# Altium PCB ESP8266_Amp_SMD.PcbDoc
Units mm, origin at the board's own origin, x right, y up, seen from the top; angles counter-clockwise.
Board outline 35.05 x 30.35 mm, 2 copper layers (Top Layer, Bottom Layer); 28 components, 26 nets, 93 pads, 23 vias.
Unrouted connection lines stored in the file: 1.
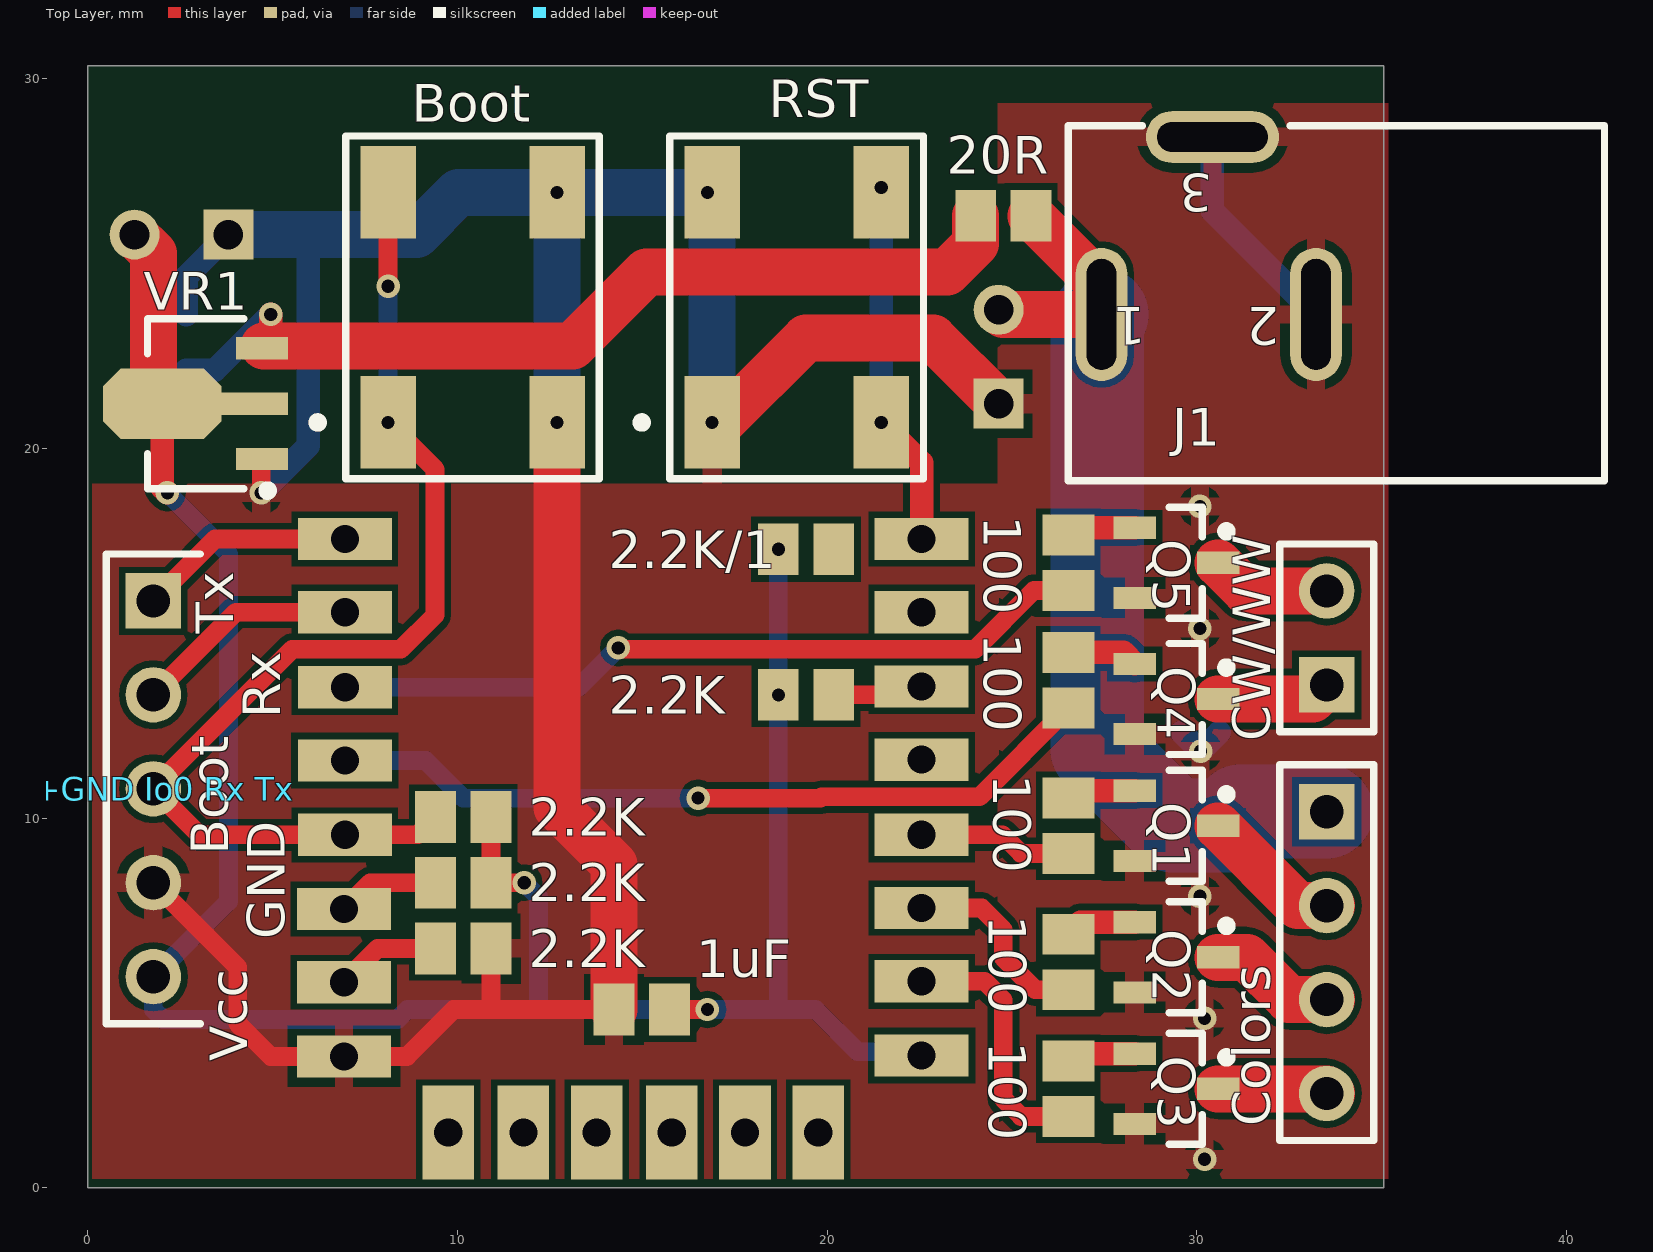
[diagram p0: Top Layer view]
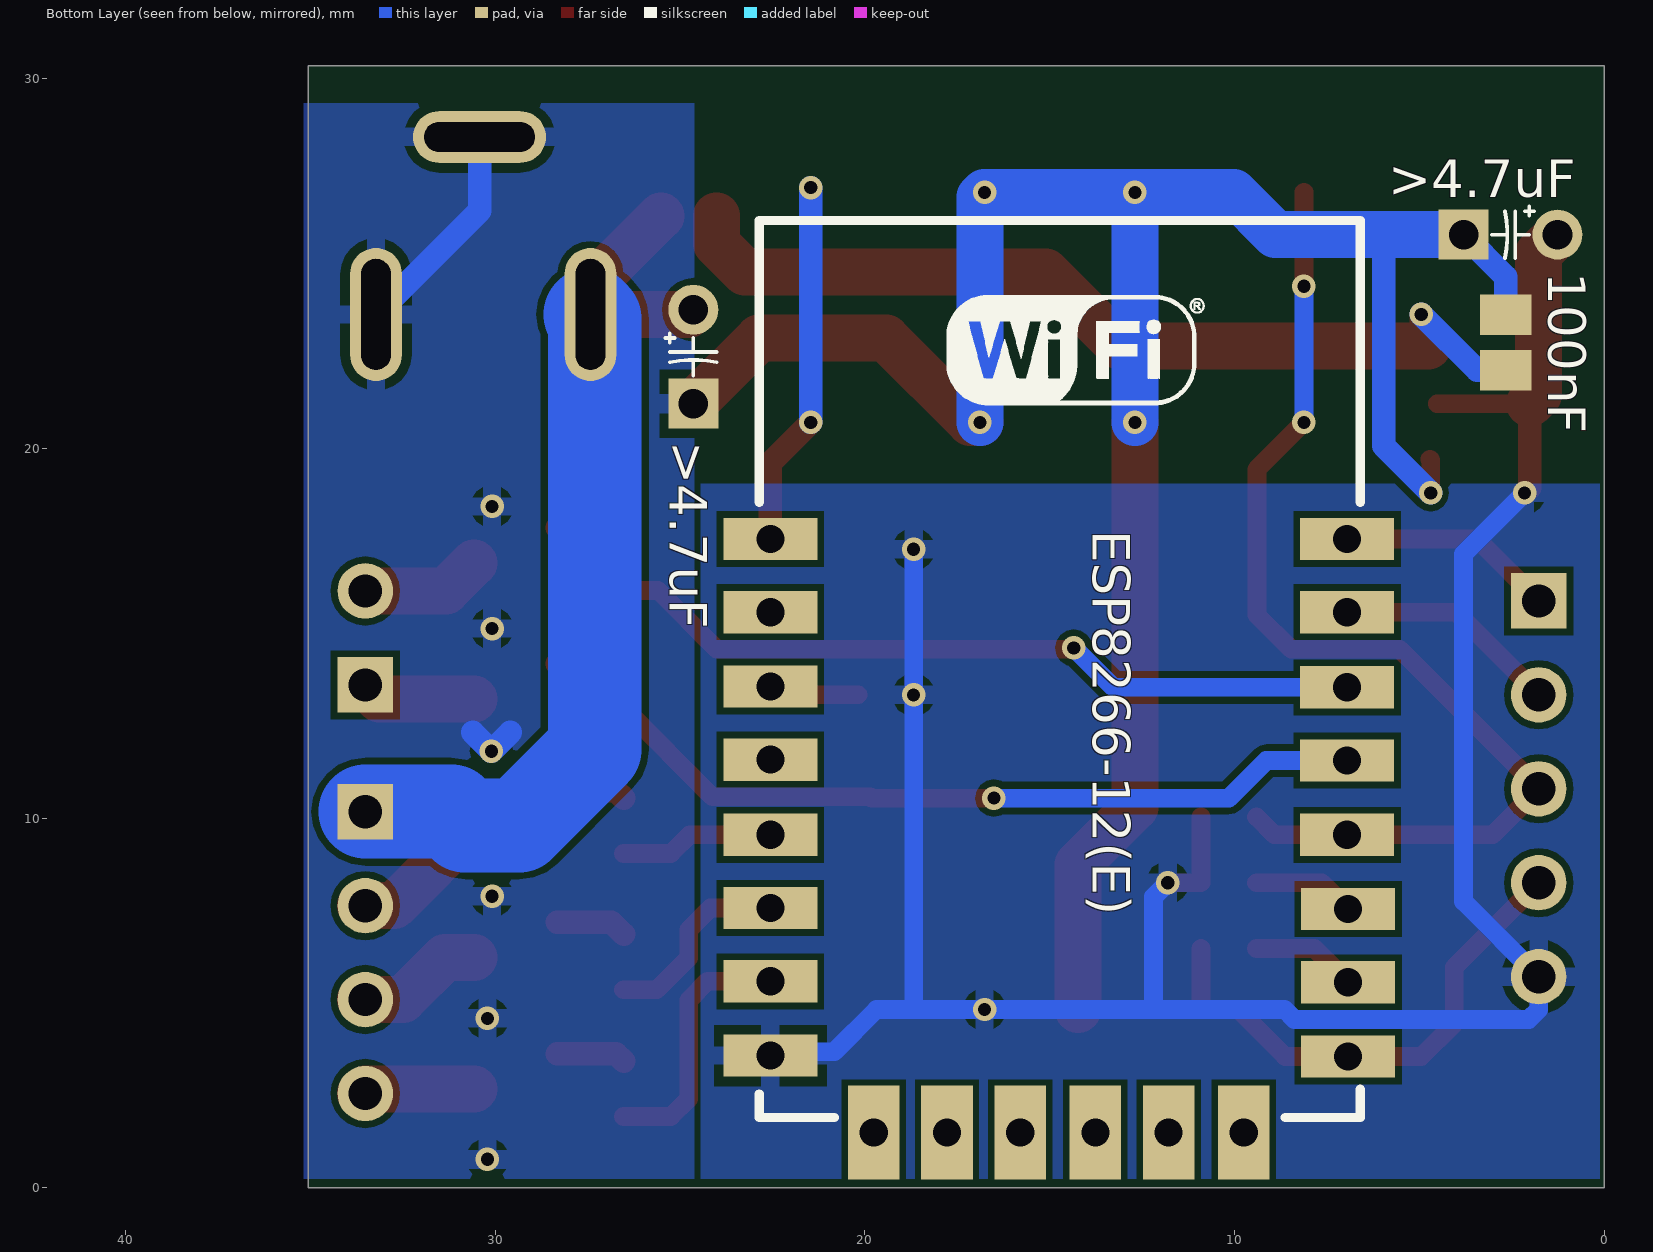
[diagram p1: Bottom Layer view, seen from below]

## Layer stack, top to bottom
Top Solder: solder mask 0.0102, Solder Resist, Dk 3.5
Top Layer: signal copper 0.0356
Dielectric 1: dielectric 0.32, FR-4, Dk 4.8
Bottom Layer: signal copper 0.0356
Bottom Solder: solder mask 0.0102, Solder Resist, Dk 3.5

## Board outline
0,0 0,30.353 35.052,30.353 35.052,0

## Design rules (kind name [scope] priority, off if disabled: settings)
Clearance [All] p1: gap=0.178
PolygonConnect [All] p1: connectstyle=Relief reliefconductorwidth=0.508 reliefentries=4 polygonreliefangle="90 Angle" airgapwidth=0.254
RoutingVias [All] p1: holewidth=0.356 width=0.635 viastyle="Through Hole" minholewidth=0.356 minwidth=0.635 maxholewidth=0.356 maxwidth=0.635
SolderMaskExpansion [All] p1: expansion=0.102
Width [All] p1: maxlimit=10 minlimit=0.254 preferedwidth=0.254 minimp=50.000000 maximp=50.000000 favimp=50.000000
29 further rules are at their usual default settings.

## Components (designator, comment, footprint, x,y, rotation, side; value= is the part's Value field where it differs from the comment)
1uF "Cap" 0805 14.986,4.826 r0 top (schematic designator C1)
2.2K "Res" 0805 19.431,13.335 r180 top
2.2K "Res" 0805 10.16,8.255 r180 top (schematic designator 2.2K/4)
2.2K "Res" 0805 10.16,10.033 r180 top (schematic designator 2.2K/3)
2.2K "Res" 0805 10.16,6.477 r180 top (schematic designator 2.2K/2)
2.2K/1 "Res" 0805 19.431,17.272 r180 top
20R "Res" 0805 24.765,26.289 r180 top (schematic designator R1)
100 "Res" 0805 26.525,2.682 r270 top (schematic designator 100R/5)
100 "Res" 0805 26.525,6.111 r270 top (schematic designator 100R/4)
100 "Res" 0805 26.525,9.794 r270 top (schematic designator 100R/3)
100 "Res" 0805 26.525,16.906 r270 top (schematic designator 100R/2)
100 "Res" 0805 26.525,13.731 r270 top (schematic designator 100R/1)
100nF "Cap" 0805 2.667,22.86 r270 bottom (schematic designator C2)
>4.7uF "Cap Pol" CAPR-2.54mm 2.54,25.781 r180 bottom (schematic designator C20)
>4.7uF "Cap Pol" CAPR-2.54mm 24.638,22.479 r90 bottom (schematic designator C19)
Boot "Tactile Switch" "Tactile-SW SMT" 8.128,20.828 r90 top
Colors "Header 4" HDR1X4 33.51,10.175 r270 top
CW/WW "Header 2" HDR1X2 33.51,13.604 r90 top
ESP8266-12(E) "ESP8266 ESP-12-E" "ESP8266 ESP-12-E" 5.969,1.143 r180 bottom (schematic designator IC1)
J1 "12V_DC_Jack" 694106301002 41.021,23.622 r180 top
Q1 "MOSFET_NCE2302" SOT23 29.446,9.794 r0 top
Q2 "MOSFET_NCE2302" SOT23 29.446,6.238 r0 top
Q3 "MOSFET_NCE2302" SOT23 29.446,2.682 r0 top
Q4 "MOSFET_NCE2302" SOT23 29.446,13.223 r0 top
Q5 "MOSFET_NCE2302" SOT23 29.446,16.906 r0 top
RST "Tactile Switch" "Tactile-SW SMT" 16.891,20.828 r90 top
"V+GND Io0 Rx Tx" "Header 5" HDR1X5 1.778,15.875 r270 top (schematic designator Programming)
VR1 "AMS1117" SOT89 2.921,21.209 r180 top

## Footprints (in the part's own frame and the unit in brackets; to place one, negate y for a bottom-side part, rotate by r counter-clockwise, add the part's x,y. Pads: shape width x height; smd on the part's side, far side on the other; paste and mask are expansions set on the pad)
0805 [mm] "Chip Capacitor, Body 2.0x1.3mm, IPC High Density"
  rect 1.1x1.4 smd: 1(-0.75,0) 2(0.75,0)
  body extent -1.1,-0.72 1.1,0.72, height 1.4
694106301002 [mm] "WR-DC_DC Power Jack_Right Angled_THT Center Pin ?2.0_Plug ID ?2.05_Plug OD ?5.5"
  oval 1.4x3.6 hole 0.8 slot 3 at 90 deg: 1(13.6,0) 2(7.8,0)
  oval 3.6x1.4 hole 0.8 slot 3 at 0 deg: 3(10.6,-4.8)
  silkscreen extent 0,-5.1 14.5,4.5, body extent 0,-4.9 14.5,4.5, height 10.85
CAPR-2.54mm [mm] "Capacitor; 2 Leads"
  rect 1.35x1.35 hole 0.8: 1(-1.27,0)
  round 1.35 hole 0.8: 2(1.27,0)
  silkscreen extent -0.51,-0.64 0.64,0.76
"ESP8266 ESP-12-E" [mil] "ESP8266 ESP-12-E"
  rect 100x45 hole 30: 1(-653,646) 2(-653,568) 3(-653,489) 4(-653,411) 5(-653,331) 6(-653,253) 7(-653,175) 8(-653,96) 15(-38,95) 16(-38,174) 17(-38,252) 18(-39,331) 19(-39,410) 20(-39,488) 21(-39,568) 22(-39,646)
  rect 55x100 hole 30: 9(-543,14) 10(-465,14) 11(-387,14) 12(-307,14) 13(-229,14) 14(-149,14)
  silkscreen extent -665,30 -25,985, body extent -661,35 -31,980, height 86
HDR1X2 [mm] "Connector; Header; 2 Position"
  rect 1.5x1.5 hole 0.9: 1(0,0)
  round 1.5 hole 0.9: 2(2.54,0)
  silkscreen extent -1.27,-1.27 3.81,1.27
HDR1X4 [mm] "Connector; Header; 4 Position"
  rect 1.5x1.5 hole 0.9: 1(0,0)
  round 1.5 hole 0.9: 2(2.54,0) 3(5.08,0) 4(7.62,0)
  silkscreen extent -1.27,-1.27 8.89,1.27
HDR1X5 [mm] "Connector; Header; 5 Position"
  rect 1.5x1.5 hole 0.9: 1(0,0)
  round 1.5 hole 0.9: 2(2.54,0) 3(5.08,0) 4(7.62,0) 5(10.16,0)
  silkscreen extent -1.27,-1.27 11.43,1.27
SOT23 [mm] "SOT23, 3-Leads, Body 2.9x1.3mm, Pitch 0.95mm, Lead Span 2.3mm - Reverse Pinning, IPC Medium Density"
  rect 1.15x0.6 smd: 1(-1.125,-0.95) 2(-1.125,0.95) 3(1.125,0)
  silkscreen extent -0.2,-1.5 1.48,1.5, body extent -0.7,-1.5 0.7,1.5, height 1.1
SOT89 [mm] "SOT89, 3-Leads, Body 4.5x2.4 mm, Pitch 1.5mm, Lead Span 4.1mm, IPC Medium Density"
  rect 1.4x0.6 smd: 1(-1.8,1.5) 3(-1.8,-1.5)
  rect 1.8x0.6 smd: 2(-1.6,0)
  oct 3.2x1.9 smd: 2(0.9,0)
  silkscreen extent -2.07,-2.3 1.3,2.47, body extent -1.3,-2.3 1.3,2.3, height 1.6
"Tactile-SW SMT" [mm] "Photosensitive Diode; 2 Leads"
  rect 2.5x1.5 smd: 1(-0.127,0) 2(6.096,0) 3(-0.127,-4.572) 4(6.096,-4.572)
  silkscreen extent -1.65,-5.71 7.62,2.03

## Part data
1uF 100nF: "Capacitor"
2.2K 2.2K 2.2K 2.2K 2.2K/1 20R 100 100 100 100 100: "Resistor"
>4.7uF >4.7uF: "Polarized Capacitor (Axial)"
Boot RST: library part Tact_SW
Colors: "Header, 4-Pin"
CW/WW: "Header, 2-Pin"
J1: "WR-DC DC Power Jack Right Angled(6.4)"
Q1 Q2 Q3 Q4 Q5: "SOT-23 MOSFET, Vgs_th = 0.85V, Id_max = 4A, Vds_max = 20V"
"V+GND Io0 Rx Tx": "Header, 5-Pin"
VR1: library part VoltageRegulator_G/O/I, "Voltage Regulator"

## Via types
v1: diameter 0.635, hole 0.356, Top Layer to Bottom Layer, 16 vias
v2: diameter 0.635, hole 0.356, Top Layer to Bottom Layer, tented both sides, 7 vias

## Nets (pads, with @x,y where several pads share a name; then routed paths per layer and width w, separated by ;. In a path a pad name is that pad's centre, name@x,y a point inside that pad or via, vN(x,y) a via of type N, cw(c..) or ccw(c..) an arc to the next point about the centre after c; other vN are vias at no path point)
GND: 1uF.1 2.2K.1@10.91,6.477 100nF.1 "V+GND Io0 Rx Tx.4" >4.7uF.1 Boot.3 Boot.4 ESP8266-12(E).15 J1.2 J1.3 Q1.1 Q2.1 Q3.1 Q4.1 Q5.1 RST.1 RST.2 VR1.1 | length 87.9
  Top Layer w0.508: 1.778,8.255 4.064,5.969 4.064,4.445 4.953,3.556 6.934,3.556 8.636,3.556 9.906,4.826 10.795,4.826 ; v1(4.699,18.796) 4.699,19.687 VR1.1 ; 2.2K.1@10.91,6.477 10.91,4.941 10.795,4.826 ; 1uF.1 10.795,4.826
  Top Layer w1.27: v1(12.7,20.701) 12.7,10.287 14.236,8.751 1uF.1 ; v1(16.891,20.701) 17.145,20.701 19.431,22.987 22.86,22.987 >4.7uF.1@24.638,21.209
  Bottom Layer w0.635: 100nF.1 2.667,24.638 >4.7uF.1@3.81,25.781 ; v1(4.699,18.796) 5.969,20.066 5.969,25.781 ; 29.591,12.319 v2(30.099,11.811) 30.607,12.319 ; J1.3 30.421,26.422 J1.2
  Bottom Layer w1.27: >4.7uF.1@3.81,25.781 5.969,25.781 8.89,25.781 10.033,26.924 v1(12.7,26.924) ; v1(12.7,20.701) v1(12.7,26.924) ; v1(16.891,20.701) 16.891,26.797 v1(16.764,26.924) v1(12.7,26.924)
  other v2: 30.208,0.777 30.208,4.587 30.081,7.889 30.081,15.128 30.081,18.43
IO0: 2.2K.2@9.41,10.033 "V+GND Io0 Rx Tx.3" Boot.1 Boot.2 ESP8266-12(E).18 | length 29.9
  Top Layer w0.508: v1(8.128,20.701) 9.398,19.431 9.398,15.494 8.471,14.567 5.536,14.567 1.778,10.809 1.778,10.795 3.023,9.55 6.96,9.55 8.927,9.55 2.2K.2@9.41,10.033 ; v1(8.128,24.384) Boot.2
  Bottom Layer w0.508: v1(8.128,20.701) v1(8.128,24.384)
IO4: 100.1@26.525,14.481 Q4.2 | length 1.9
  Top Layer w0.635: 100.1@26.525,14.481 28.013,14.481 Q4.2
IO5: 100.1@26.525,17.656 Q5.2 | length 1.9
  Top Layer w0.635: 100.1@26.525,17.656 26.725,17.856 Q5.2
Net2.2K/1_1: 2.2K/1.1 ESP8266-12(E).1 RST.3 RST.4 | length 10
  Top Layer w0.635: v1(21.463,20.701) 22.555,19.609 22.555,17.551
  Bottom Layer w0.635: v1(21.463,20.701) v1(21.463,27.051)
Net2.2K/2_2: 2.2K.2@9.41,6.477 ESP8266-12(E).16 | length 2.9
  Top Layer w0.508: 6.934,5.563 7.849,6.477 2.2K.2@9.41,6.477
Net2.2K/4_2: 2.2K.2@9.41,8.255 ESP8266-12(E).17 | length 2.8
  Top Layer w0.508: 6.934,7.544 7.645,8.255 2.2K.2@9.41,8.255
Net2.2K_1: 2.2K.1@20.181,13.335 ESP8266-12(E).3 | length 2.5
  Top Layer w0.508: 2.2K.1@20.181,13.335 22.327,13.335 22.555,13.564
Net100R/1_2: 100.2@26.525,12.981 ESP8266-12(E).19 | length 21
  Top Layer w0.508: v1(16.51,10.541) 19.812,10.541 19.85,10.579 24.123,10.579 100.2@26.525,12.981
  Bottom Layer w0.508: 6.96,11.557 9.144,11.557 10.16,10.541 v1(16.51,10.541)
Net100R/2_2: 100.2@26.525,16.156 ESP8266-12(E).20 | length 20.7
  Top Layer w0.508: v1@14.351,14.567 24.004,14.567 25.593,16.156 100.2@26.525,16.156
  Bottom Layer w0.508: 6.96,13.538 13.284,13.538 v1(14.351,14.605)
Net100R/3_1: 100.1@26.525,10.544 Q1.2 | length 1.9
  Top Layer w0.635: 100.1@26.525,10.544 26.725,10.744 Q1.2
Net100R/3_2: 100.2@26.525,9.044 ESP8266-12(E).5 | length 4.2
  Top Layer w0.508: 22.555,9.55 24.74,9.55 25.246,9.044 100.2@26.525,9.044
Net100R/4_1: 100.1@26.525,6.861 Q2.2 | length 1.9
  Top Layer w0.635: 100.1@26.525,6.861 26.852,7.188 Q2.2
Net100R/4_2: 100.2@26.525,5.361 ESP8266-12(E).6 | length 5.3
  Top Layer w0.508: 22.555,7.569 24.181,7.569 24.765,6.985 24.765,6.223 25.627,5.361 100.2@26.525,5.361
Net100R/5_1: 100.1@26.525,3.432 Q3.2 | length 1.9
  Top Layer w0.635: 100.1@26.525,3.432 26.725,3.632 Q3.2
Net100R/5_2: 100.2@26.525,1.932 ESP8266-12(E).7 | length 7
  Top Layer w0.508: 22.555,5.588 24.257,5.588 24.765,5.08 24.765,2.413 25.246,1.932 100.2@26.525,1.932
NetC2_2: 20R.2 100nF.2 VR1.3 | length 25.1
  Top Layer w0.635: VR1.3 4.776,22.764 4.953,22.941 v1(4.953,23.622)
  Top Layer w1.27: VR1.3@4.776,22.764 13.112,22.764 15.113,24.765 23.241,24.765 24.015,25.539 20R.2
  Bottom Layer w0.635: 100nF.2 3.441,22.11 v1(4.953,23.622)
NetC19_2: 20R.1 >4.7uF.2@24.638,23.749 Colors.1 J1.1 | length 25.3
  Top Layer w1.27: >4.7uF.2@24.638,23.749 24.765,23.622 J1.1 27.421,24.383 20R.1
  Bottom Layer w2.54: J1.1 27.305,23.506 27.305,11.851 29.35,9.807 30.812,9.807 31.181,10.175 Colors.1
NetColors_2: Colors.2 Q1.3 | length 4
  Top Layer w1.27: Q1.3 32.73,7.635 Colors.2@33.637,7.635
NetColors_3: Colors.3 Q2.3 | length 3.5
  Top Layer w1.27: Q2.3 31.351,6.238 32.494,5.095 Colors.3@33.637,5.095
NetColors_4: Colors.4 Q3.3 | length 3.1
  Top Layer w1.27: Q3.3 33.51,2.682 Colors.4@33.637,2.555
NetCW/WW_1: CW/WW.1 Q4.3 | length 3.1
  Top Layer w1.27: Q4.3 33.129,13.223 CW/WW.1
NetCW/WW_2: CW/WW.2 Q5.3 | length 3.3
  Top Layer w1.27: Q5.3 31.333,16.144 CW/WW.2
RXD: "V+GND Io0 Rx Tx.2" ESP8266-12(E).21 | length 6.1
  Top Layer w0.508: 1.778,13.335 4.013,15.57 6.96,15.57
TXD: "V+GND Io0 Rx Tx.1" ESP8266-12(E).22 | length 5.9
  Top Layer w0.508: 1.778,15.875 3.454,17.551 6.96,17.551
VCC33: 1uF.2 2.2K.1@10.91,8.255 2.2K.1@10.91,10.033 2.2K.2@18.681,13.335 2.2K/1.2 "V+GND Io0 Rx Tx.5" >4.7uF.2@1.27,25.781 ESP8266-12(E).8 VR1.2 | length 66.6
  Top Layer w0.508: VR1.2@2.021,21.209 VR1.2@4.521,21.209 ; 2.2K.1@10.91,10.033 10.91,8.255 v1(11.811,8.255) ; 1uF.2 v2(16.764,4.826)
  Top Layer w0.635: VR1.2@2.021,21.209 2.021,18.934 v1(2.159,18.796)
  Top Layer w1.27: >4.7uF.2@1.27,25.781 1.778,25.273 1.778,21.452 VR1.2@2.021,21.209
  Bottom Layer w0.508: v1(2.159,18.796) 3.81,17.145 3.81,7.747 1.778,5.715 1.778,4.826 2.045,4.559 8.383,4.559 8.65,4.826 12.192,4.826 ; v1(11.811,8.255) 12.192,7.874 12.192,4.826 ; v1(18.681,17.272) v1(18.681,13.335) 18.681,4.941 18.796,4.826 ; 22.555,3.581 22.454,3.683 20.828,3.683 19.685,4.826 18.796,4.826 ; 12.192,4.826 v2(16.764,4.826) 18.796,4.826
pads on no net: ESP8266-12(E).2 ESP8266-12(E).4 ESP8266-12(E).9 ESP8266-12(E).10 ESP8266-12(E).11 ESP8266-12(E).12 ESP8266-12(E).13 ESP8266-12(E).14

## Polygon pours and split planes (outlines as drawn)
GND on Top Layer "Top Layer-No Net" (solid, remove dead copper, pour order 10): 24.638,0.254 24.638,19.05 0.127,19.05 0.127,0.254
GND on Top Layer "Top Layer-No Net" (solid, remove dead copper, pour order 4): 24.62,29.337 35.179,29.337 35.179,0.254 24.62,0.254
VCC33 on Bottom Layer "Top Layer-No Net" (solid, remove dead copper, pour order 12): 24.638,19.05 24.615,19.032 24.615,0.254 0.127,0.254 0.127,19.05
GND on Bottom Layer "Top Layer-No Net" (solid, remove dead copper, pour order 6): 24.62,29.337 35.179,29.337 35.179,0.254 24.62,0.254

## Silkscreen, mask and mechanical layers (free items; w line width, h text height)
Top Overlay:
  text "Tx" at 3.937,14.986 h1.02 r90
  text "Rx" at 5.207,12.7 h1.02 r90
  text "Boot" at 3.81,9.017 h1.02 r90
  text "GND" at 5.334,6.731 h1.02 r90
  text "Vcc" at 4.318,3.429 h1.02 r90
Mechanical 1:
  the board outline again, w0.254
Mechanical 16:
  lines w0.254: 8.128,2.667 8.128,18.288 21.209,18.288 21.209,2.667 8.128,2.667

## Text inside footprints (layer, text, board x,y; h text height)
ESP8266-12(E): Mechanical 13 "CUTOUT POLYGON" at 22.554,25.034 h1.02; Mechanical 13 "ANTENNA AREA" at 22.554,25.542 h1.02
J1: Top Overlay "3" at 30.421,27.422 h1.02 r180; Top Overlay "2" at 32.221,23.822 h1.02 r180; Top Overlay "1" at 28.621,23.822 h1.02 r180